# EAGLE board Super-Regenerative-Airband-1Transistor-Kamarudin2008 (EAGLE 7.6.0)
VHF Superregen for AM Aircraft Band by Kamarudin 2008 - arjip.wordpress.com https://arjip.wordpress.com/tag/airband-scanner/ https://arjip.wordpress.com/tag/super-regenerative/ http://radiobuilder.blogspot.ch/2012/10/airbandregen1t.html

Size 35.54 x 37.77 mm. Coordinates in mm from the lower left corner, seen from the top.
Outline: 0,0 35.54,0 35.54,37.77 0,37.77 0,0
Copper layers (1*16): Top 0.035mm / dielectric 1.5mm / Bottom 0.035mm
Design rules "default": minimum track width 10mil, minimum drill 24mil, track to track 8mil, track to pad 8mil, pad to pad 8mil, via to via 8mil, smd to smd 8mil, copper to edge 40mil, drill to drill 8mil, minimum pad ring 10mil, minimum via ring 8mil, stop-mask expansion 4mil, vias tented up to drill 0mil, thermal gap 10mil
Net classes: 0 default: width 0.61 mm

## Footprints (pad centres in the part's own frame; a part is rotated, then mirrored left to right if it is on the bottom)
SPAD = drill 1 pad 1.778: 1 0,0
C050-020X036 = drill 0.8: 1 -2.54,0; 2 2.54,0
C025-015X024 = drill 0.8: 1 0,1.27; 2 0,-1.27
TRIM-2222-808 = drill 1.1 octagon: 1 -2.54,2.54; 2 -2.54,-2.54; 3 2.54,-2.54
C025-020X036 = drill 0.8: 1 0,0; 2 2.54,0
C050-025X075 = drill 0.8: 1 2.54,0; 2 -2.54,0
L-04/7V-X = drill 0.8: 1 -1.27,-3.81; 2 1.27,3.81
L-04-5/6V = drill 0.8: 1 -1.27,2.54; 2 1.27,-2.54
POT = drill 1 pad 1.93: 1 -2.54,0; 2 0,0; 3 2.54,0
0202/7 = drill 0.7: 1 0,3.81; 2 0,-3.81
SLSW-1P2T-H = drill 1.1 pad 1.524 octagon: 1 2.54,0; 2 0,0; 3 -2.54,0
TO92 = drill 0.8 octagon: 1 -2.54,0; 2 0,0; 3 2.54,0

## Placement (x,y rotation side)
ANT1  ANT  [SPAD]  22.86,22.86 0 top
AOUT+  SPAD  [SPAD]  30.48,10.16 0 top
AOUT-  SPAD  [SPAD]  30.48,7.62 0 top
BAT+  SPAD  [SPAD]  30.48,27.94 0 top
BAT-  SPAD  [SPAD]  30.48,25.4 0 top
C1  6p  [C050-020X036]  17.78,20.32 90 top
C2  2p  [C025-015X024]  20.32,21.59 0 top
C3  15 - 140p  [TRIM-2222-808]  7.62,30.48 90 top
C4  470n  [C050-020X036]  12.7,12.7 180 top
C5  1n  [C025-020X036]  10.16,10.16 270 top
C6  1n  [C050-020X036]  20.32,5.08 270 top
C7  470n  [C050-020X036]  25.4,15.24 270 top
C8  [C050-025X075]  20.32,30.48 90 top
L1  6turns on d=0.7mm  [L-04/7V-X]  13.97,29.21 0 top
L2  L-SHORT02/5  [L-04-5/6V]  21.59,15.24 0 top
R1  47k  [POT]  2.54,20.32 270 top
R2  12k  [0202/7]  16.51,10.16 90 top
R3  12k  [0202/7]  22.86,6.35 0 top
R4  22k  [0202/7]  27.94,13.97 0 top
R5  68  [0202/7]  8.89,20.32 90 top
SW1  SL-SW-1P-2T-H  [SLSW-1P2T-H]  27.94,33.02 0 top
T1  2N3904  [TO92]  15.24,20.32 90 top

## Library data of the parts
ANT1 AOUT+ AOUT- BAT+ BAT- = pad
C1 C2 C4-C8 = c
C3 = cap-trim
L1 L2 = l
R1-R5 = r
SW1 = sw
T1 = t

## Nets
GND: AOUT-.1 BAT-.1 C3.2 C5.2 C6.2 C8.2 R1.3 R3.2
N$1: C1.2 L1.1 T1.3
N$2: C1.1 C2.2 L2.1 T1.1
N$3: C3.3 C8.1 L1.2 R1.1 SW1.3
N$4: C4.2 C5.1 R5.2 T1.2
N$5: ANT1.1 C2.1
N$6: BAT+.1 SW1.1 SW1.2
N$7: C4.1 R2.1
N$8: C7.1 R4.1
N$10: AOUT+.1 R4.2
N$11: R1.2 R5.1
N$12: C6.1 C7.2 L2.2 R2.2 R3.1

## Tracks (layer width: path | path; a pad name or v marks a point on that pad's centre or on a via)
GND  (7 unrouted)
N$1  (2 unrouted)
N$2  (3 unrouted)
N$3  (4 unrouted)
N$4  (3 unrouted)
N$5  (1 unrouted)
N$6  (2 unrouted)
N$7  (1 unrouted)
N$8  (1 unrouted)
N$10  (1 unrouted)
N$11  (1 unrouted)
N$12  (4 unrouted)